# EAGLE board bb8 (EAGLE 6.4)
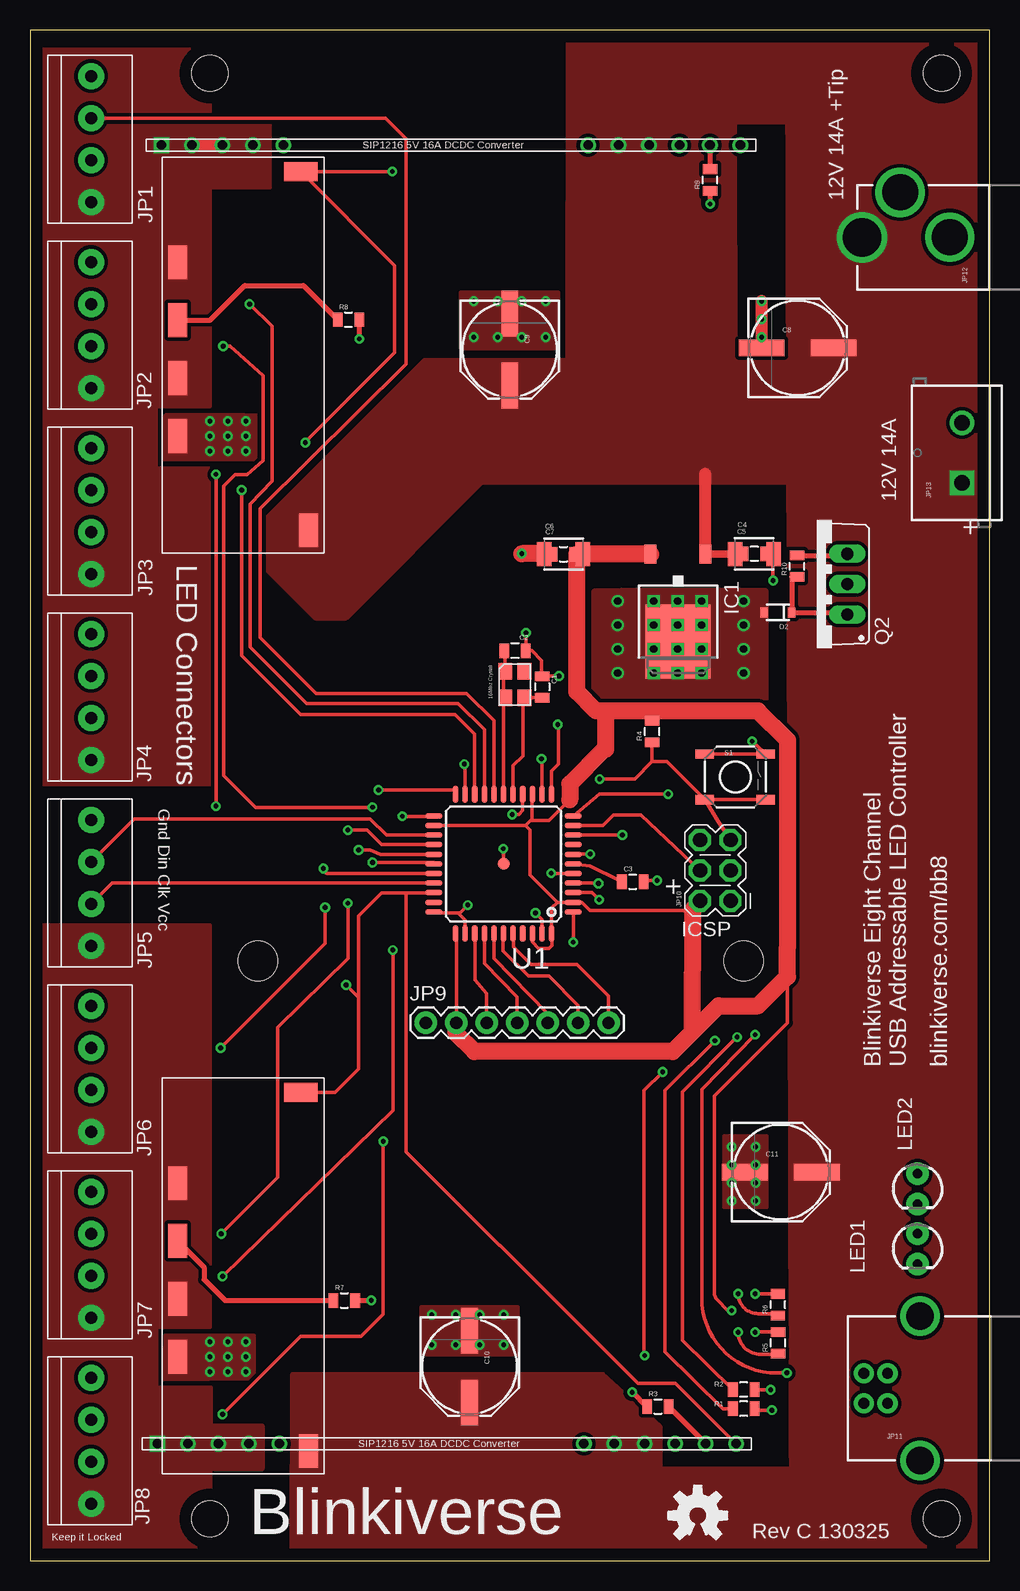
[diagram p0: board, top side]
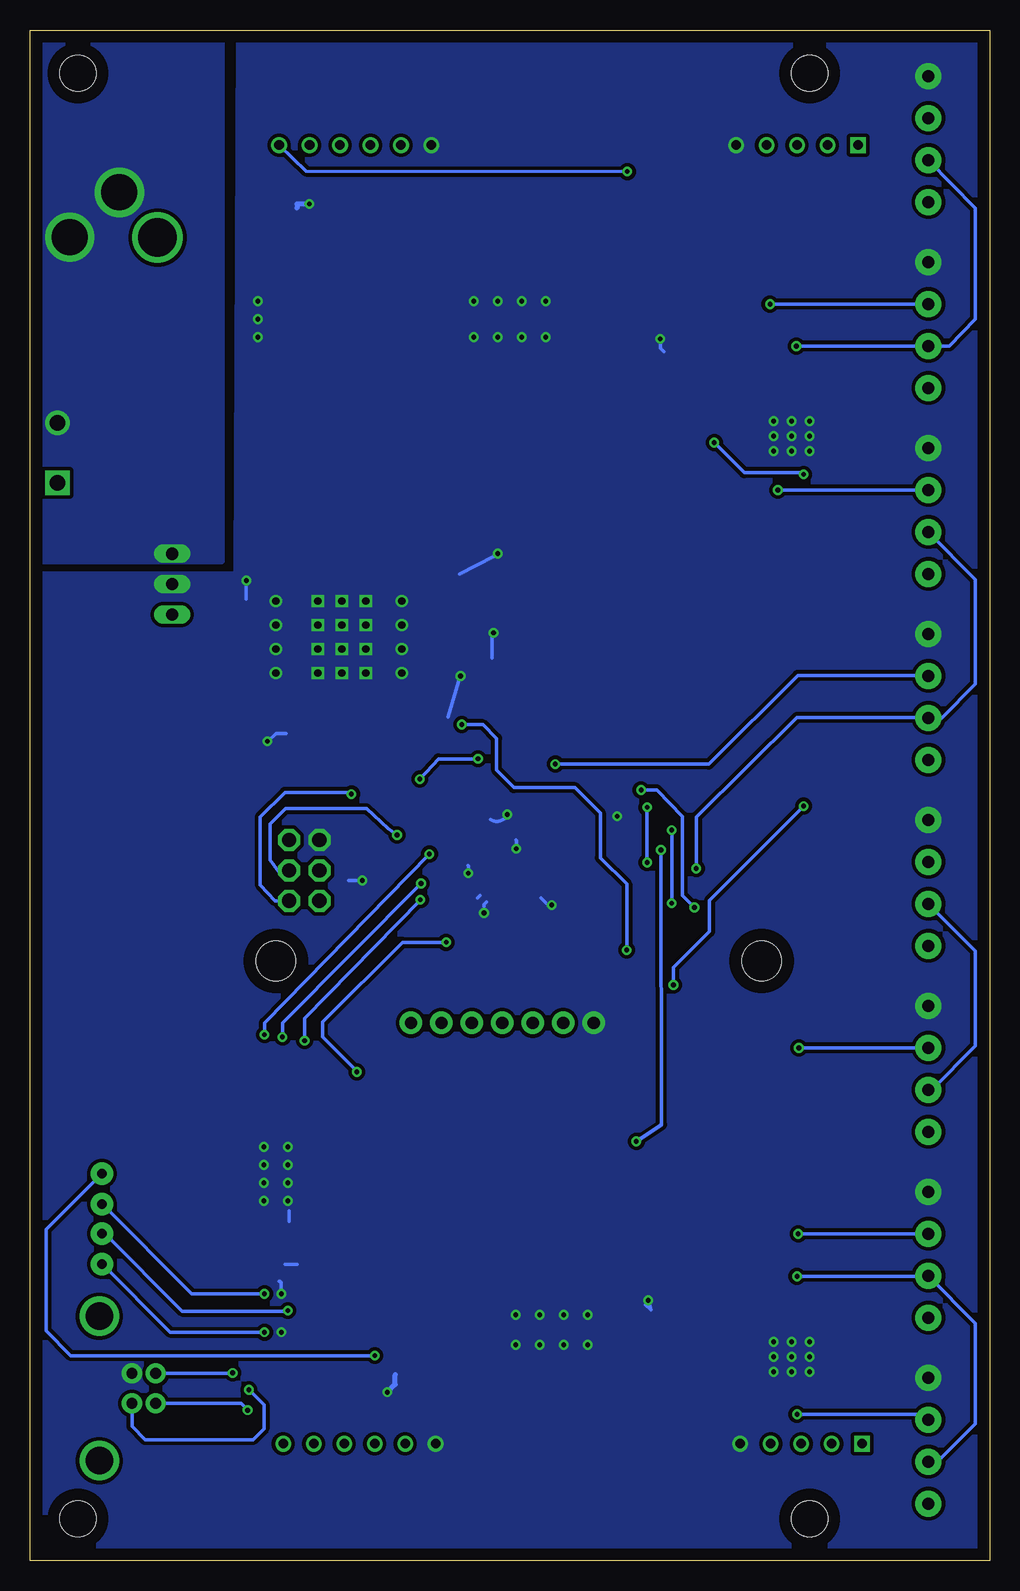
[diagram p1: board, bottom side, seen from below]

Size 80 x 127.6 mm. Coordinates in mm from the lower left corner, seen from the top.
Outline: 0,0 80,0 80,127.6 0,127.6 0,0
Copper layers (1*16): Top 0.035mm / dielectric 1.5mm / Bottom 0.035mm
Design rules "default *": minimum track width 8mil, minimum drill 15mil, track to track 8mil, track to pad 8mil, pad to pad 8mil, via to via 8mil, smd to smd 8mil, copper to edge 40mil, drill to drill 10mil, minimum pad ring 10mil, minimum via ring 8mil, stop-mask expansion 4mil, vias tented up to drill 0mil, thermal gap 10mil
Net classes: 0 default: width 0.305 mm, clearance 0.305 mm; 1 power: width 3.124 mm, clearance 0.635 mm
Holes 3 mm at 15,3.5 76,3.5 15,124 76,124

## Footprints (pad centres in the part's own frame; a part is rotated, then mirrored left to right if it is on the bottom)
0805 = smd 0.8 x 1.2: 1 -0.9,0; 2 0.9,0
1210 = smd 1.2 x 2: 1 -1.6,0; 2 1.6,0
PANASONIC_E = smd 3.8 x 1.4: + 3,0; - -3,0
SOD-323 = smd 0.63 x 0.83: 1 -1.15,0; 2 1.15,0
TO252 = smd 1 x 1.6: 1 -2.28,-4.8; 2 2.28,-4.8 | smd 5.4 x 6.2: 3 0,2.5
1X04-3.5MM = drill 1 pad 2.184: 1 -5.25,0; 2 -1.75,0; 3 1.75,0; 4 5.25,0
1X07 = drill 1.016 pad 1.88: 1 0,0; 2 2.54,0; 3 5.08,0; 4 7.62,0; 5 10.16,0; 6 12.7,0; 7 15.24,0
2X3_POGO = drill 1.2 pad 1.829 octagon: P$1 0,0; P$2 0,2.54; P$3 2.54,0; P$4 2.54,2.54; P$5 5.08,0; P$6 5.08,2.54
USB-B-PTH = drill 0.914 pad 1.676: D+ 0,1.25; D- 1.981,1.25; GND 0,-1.25; VBUS 1.981,-1.25 | drill 2.286: S1 -2.718,-6.02; S2 -2.718,6.02
POWER_JACK_PTH_LOCK = drill 2.997 pad 4.115: GND 0.025,6.557; GNDBREAK 3.762,10.7 | drill 3.2 pad 4.115: PWR 0,13.878
SCREWTERMINAL-5MM-2 = drill 1.3 pad 2.032 square: 1 0,0 | drill 1.3 pad 2.032: 2 5,0
LED3MM = drill 0.813 pad 1.88: A -1.27,0; K 1.27,0
XS3225 = smd 1.4 x 1.15: P$1 -1.1,-0.8; P$2 1.1,-0.8; P$3 1.1,0.8; P$4 -1.1,0.8
TO220BV = drill 1.016 long: D 0,-2.54; G -2.54,-2.54; S 2.54,-2.54
TACTILE_SWITCH_SMD = smd 1.524 x 0.762: 1 -2.54,1.905; 2 2.54,1.905; 3 -2.54,-1.905; 4 2.54,-1.905
ARDUINO_LEONARDO-REV3B_SMARTPRJ_TQFP44-PAD = smd 1.4 x 0.45: 1 -5.8,4; 2 -5.8,3.2; 3 -5.8,2.4; 4 -5.8,1.6; 5 -5.8,0.8; 6 -5.8,0; 7 -5.8,-0.8; 8 -5.8,-1.6; 9 -5.8,-2.4; 10 -5.8,-3.2; 11 -5.8,-4; 23 5.8,-4; 24 5.8,-3.2; 25 5.8,-2.4; 26 5.8,-1.6; 27 5.8,-0.8; 28 5.8,0; 29 5.8,0.8; 30 5.8,1.6; 31 5.8,2.4; 32 5.8,3.2; 33 5.8,4 | smd 0.45 x 1.4: 12 -4,-5.8; 13 -3.2,-5.8; 14 -2.4,-5.8; 15 -1.6,-5.8; 16 -0.8,-5.8; 17 0,-5.8; 18 0.8,-5.8; 19 1.6,-5.8; 20 2.4,-5.8; 21 3.2,-5.8; 22 4,-5.8; 34 4,5.8; 35 3.2,5.8; 36 2.4,5.8; 37 1.6,5.8; 38 0.8,5.8; 39 0,5.8; 40 -0.8,5.8; 41 -1.6,5.8; 42 -2.4,5.8; 43 -3.2,5.8; 44 -4,5.8 | smd 1 x 1: P$1 0,0
SMT1216_DCDC = smd 2.8 x 1.6: 1 1.88,1.28; 3 24.24,12.2; 4 19.41,12.2; 5 14.58,12.2; 6 9.75,12.2 | smd 1.6 x 2.8: 2 31.78,1.91
SIP1216_DCDC = drill 0.8 square: 1 1.27,0.5 | drill 0.8: 2 3.81,0.5; 3 6.35,0.5; 4 8.89,0.5; 5 11.43,0.5; 6 36.83,0.5; 7 39.37,0.5; 8 41.91,0.5; 9 44.45,0.5; 10 46.99,0.5; 11 49.53,0.5
STAND-OFF = hole 3.302: 0,0

## Placement (x,y rotation side)
C1  16pF  [0805]  42.7,72.84 270 top
C2  16pF  [0805]  40.44,75.86 180 top
C3  1uF  [0805]  50.26,56.6 0 top
C4  .3uF  [1210]  60.39,83.93 0 top
C5  .3uF  [0805]  60.39,83.93 180 top
C6  .1uF  [1210]  44.48,83.9 180 top
C7  .1uF  [0805]  44.48,83.91 0 top
C8  [PANASONIC_E]  64,101.1 0 top
C9  [PANASONIC_E]  40,100.95 270 top
C10  [PANASONIC_E]  36.65,16.2 270 top
C11  [PANASONIC_E]  62.6,32.4 0 top
D2  ZENER  [SOD-323]  62.35,79.05 180 top
IC1  7805  [TO252]  54.03,79.12 180 top
JP1  1X4-3.5MM  [1X04-3.5MM]  5.1,118.5 270 top
JP2  1X4-3.5MM  [1X04-3.5MM]  5.1,103 270 top
JP3  1X4-3.5MM  [1X04-3.5MM]  5.1,87.5 270 top
JP4  1X4-3.5MM  [1X04-3.5MM]  5.1,72 270 top
JP5  1X4-3.5MM  [1X04-3.5MM]  5.1,56.5 270 top
JP6  1X4-3.5MM  [1X04-3.5MM]  5.1,41 270 top
JP7  1X4-3.5MM  [1X04-3.5MM]  5.1,25.5 270 top
JP8  1X4-3.5MM  [1X04-3.5MM]  5.1,10 270 top
JP9  [1X07]  33,44.84 0 top
JP10  [2X3_POGO]  58.4,55 90 top
JP11  USB-B  [USB-B-PTH]  71.5,14.36 180 top
JP12  VIN  [POWER_JACK_PTH_LOCK]  83.24,110.3 90 top
JP13  [SCREWTERMINAL-5MM-2]  77.7,89.85 90 top
LED1  PWR  [LED3MM]  74,26 270 top
LED2  DATA  [LED3MM]  74,31 270 top
Q1  16Mhz Crystal  [XS3225]  40.42,73.03 270 top
Q2  [TO220BV]  65.6,81.4 90 top
R1  22  [0805]  59.5,12.67 180 top
R2  22  [0805]  59.5,14.26 180 top
R3  1.47k 1%  [0805]  52.35,12.85 0 top
R4  10k  [0805]  51.86,69.12 90 top
R5  10k  [0805]  62.36,18.17 90 top
R6  10k  [0805]  62.35,21.35 90 top
R7  1.47k 1%  [0805]  26.2,21.7 0 top
R8  1.47k 1%  [0805]  26.55,103.45 0 top
R9  1.47k 1%  [0805]  56.7,115.1 90 top
R10  15k  [0805]  63.95,82.9 90 top
S1  RESET  [TACTILE_SWITCH_SMD]  58.8,65.34 0 top
U1  Atmega32U4  [ARDUINO_LEONARDO-REV3B_SMARTPRJ_TQFP44-PAD]  39.48,58.09 180 top
U$1  SMT1216-SIP1216_DCDCSMT  [SMT1216_DCDC]  24.5,84 90 top
U$2  SMT1216-SIP1216_DCDCSMT  [SMT1216_DCDC]  24.5,7.25 90 top
U$3  SMT1216-SIP1216_DCDCSIP  [SIP1216_DCDC]  9.35,9.25 0 top
U$4  SMT1216-SIP1216_DCDCSIP  [SIP1216_DCDC]  9.7,117.5 0 top
U$12  [OSHW-LOGO-M]  55.68,3.77 0 top
U$13  [STAND-OFF]  19,50 0 top
U$14  [STAND-OFF]  59.5,50 0 top

## Library data of the parts
C1 C2 R1-R10 = SparkFun-Passives
C3 = SparkFun-Capacitors; PROD_ID: CAP-08064
C4-C7 U$13 U$14 = SparkFun
C8-C11 = SparkFun-Capacitors
D2 = SparkFun-DiscreteSemi
IC1 JP1-JP8 = adafruit
JP9 JP12 JP13 = SparkFun-Connectors
JP10 = SparkFun-Connectors; PROD_ID: HW-11044
JP11 = SparkFun-Connectors; PROD_ID: CONN-08278
LED1 LED2 = SparkFun-LED
Q1 U1 U$1-U$4 U$12 = blinkiverse
Q2 = transistor-power
S1 = SparkFun-Electromechanical; PROD_ID: SWCH-08247

## Nets
CLK0-1: JP1.3 JP2.3 U1.28
CLK2-3: JP3.3 JP4.3 U1.29
CLK4-5: JP5.3 JP6.3 U1.30
CLK6-7: JP7.3 JP8.3 U1.12
CNT: U1.31 U$1.2 U$2.2 U$3.11 U$4.11
D2: LED1.K R5.2
GND: C1.1 C2.1 C3.2 C4.2 C5.1 C6.2 C7.1 C8.- C9.- C10.- C11.- D2.2 IC1.3 JP1.1 JP2.1 JP3.1 JP4.1 JP5.1 JP6.1 JP7.1 JP8.1 JP9.1 JP10.P$6 JP11.GND Q2.D R3.1 R5.1 R6.1 R7.2 R8.2 R9.1 S1.1 S1.2 U1.5 U1.15 U1.23 U1.33 U1.35 U1.43 U1.P$1 U$1.6 U$2.6 U$3.5 U$3.6 U$4.5 U$4.6
LED0: JP1.2 U1.18
LED1: JP2.2 U1.19
LED2: JP3.2 U1.20
LED3: JP4.2 U1.21
LED4: JP5.2 U1.25
LED5: JP6.2 U1.22
LED6: JP7.2 U1.26
LED7: JP8.2 U1.27
LED-DATA: LED2.A U1.1
MISO: JP10.P$1 U1.11
MOSI: JP10.P$4 U1.10
N$1: C1.2 Q1.P$3 U1.16
N$2: C2.2 Q1.P$1 U1.17
N$3: R2.2 U1.4
N$4: JP11.D+ R2.1
N$5: R1.2 U1.3
N$6: JP11.D- R1.1
N$7: C3.1 U1.6
N$9: LED2.K R6.2
N$11: JP9.3 U1.36
N$12: JP9.4 U1.37
N$13: JP9.5 U1.38
N$14: JP9.6 U1.39
N$15: JP9.7 U1.40
N$16: D2.1 Q2.G R10.1
N$17: R9.2 U$4.10
N$18: R7.1 U$2.4
N$19: R3.2 U$3.10
N$20: R8.1 U$1.4
PSGND: JP12.GND JP12.GNDBREAK JP13.2 Q2.S R10.2
RST: JP10.P$5 R4.1 S1.3 S1.4 U1.13
SCLK: JP10.P$3 U1.9
SS: U1.8
VCC: C6.1 C7.2 IC1.2 JP9.2 JP10.P$2 LED1.A R4.2 U1.2 U1.14 U1.24 U1.34 U1.42 U1.44
VIN: C4.1 C5.2 C8.+ C9.+ C10.+ C11.+ IC1.1 JP12.PWR JP13.1 U$1.1 U$2.1 U$3.7 U$3.8 U$4.7 U$4.8
VOUT: JP1.4 JP2.4 JP3.4 JP4.4 U$1.3 U$1.5 U$4.1 U$4.2 U$4.3 U$4.4
VOUT2: JP5.4 JP6.4 JP7.4 JP8.4 U$2.3 U$2.5 U$3.1 U$3.2 U$3.3 U$3.4
VUSB: JP11.VBUS U1.7

## Tracks (layer width: path | path; a pad name or v marks a point on that pad's centre or on a via)
CLK0-1  (via drill 0.4)
  Top 0.305: v28.55,62.8 18.8,62.8 16.15,65.45 16.15,89.6 17.1,90.55 18.1,90.55 19.45,91.7 19.45,98.8 16.7,101.25 v16.1,101.25 | v28.55,58.2 33.68,58.2 U1.28
  Bottom 0.305: JP1.3 1.2,112.75 1.2,103.5 3.35,101.25 JP2.3 v16.1,101.25 | v28.55,62.8 v28.55,58.2
CLK2-3  (via drill 0.4)
  Top 0.305: U1.29 24.85,57.3 arc-90 v24.45,57.7
  Bottom 0.305: JP3.3 1.2,81.8 1.2,73.1 4,70.25 JP4.3 5.15,70.3 16.05,70.3 24.45,62 v24.45,57.7
CLK4-5
  Top 0.305: JP5.3 6.84,56.49 U1.30
  Bottom 0.305: JP5.3 1.2,50.85 1.2,42.9 4.8,39.25 JP6.3
CLK6-7  (via drill 0.4)
  Top 0.305: v16.05,23.7 30.25,37.55 30.25,50.1 30.25,50.25 v30.25,50.9 | U1.12 43.48,65.83 44.05,66.4 44.05,69.65 v44,69.7
  Bottom 0.305: JP8.3 4.35,8.25 1.2,11.4 1.2,19.8 JP7.3 5.15,23.7 v16.05,23.7 | v44,69.7 42.25,69.7 41.1,68.55 41.1,65.9 39.65,64.45 34.55,64.45 32.45,62.35 32.45,58.6 30.25,56.4 v30.25,50.9
CNT  (via drill 0.4)
  Top 0.305: 27.4,46.95 27.4,53.75 29.3,55.65 31.35,55.65 | 27.4,46.95 27.4,41 25.43,39.03 U$2.2 | v26.35,48 27.4,46.95 | v30.2,115.8 26.82,115.78 U$1.2 30.4,107.97 30.4,100.7 22.95,93.25 v22.95,93.2 | v15.5,90.55 v15.5,62.9 | U$3.11 58.85,9.75 53.8,14.8 50.7,14.8 39.2,26.3 39.15,26.3 31.35,34.1 31.35,55.65 | U1.31 33.65,55.65 31.35,55.65
  Bottom 0.305: v15.5,62.9 23.35,55.05 23.35,52.45 26.35,49.45 v26.35,48 | U$4.11 56.98,115.85 v30.2,115.8 | v15.5,90.55 15.65,90.7 20.45,90.7 v22.95,93.2
D2  (via drill 0.4)
  Top 0.305: v60.45,19.05 60.47,19.07 R5.2
  Bottom 0.305: LED1.K 68.32,19.05 v60.45,19.05
GND  (via drill 0.4, 0.6)
  Top 0.305: U1.33 33.77,54 35.7,54 | 35.7,54 36.28,53.42 U1.35 | U1.23 33.72,62.05 v31.05,62.05 | 39.41,58.09 U1.P$1 39.48,59.32 v39.45,59.35 | U1.15 41.08,62.53 40.75,62.2 v40.2,62.2 | U1.5 43.46,57.29 v43.45,57.3 | 35.7,54 35.85,54 v36.5,54.65 | v41.35,77.35 41.35,75.87 C2.1 41.84,75.86 42.65,75.05 42.65,73.8 C1.1 42.71,73.75 v44.1,73.75 | C7.1 C6.2 42.84,83.95 | C4.2 C5.1 61.95,83.27 v61.95,81.7 | S1.1 S1.2 60.53,68.05 v60.2,68.3 | C3.2 51.25,56.7 v52.3,56.7 | R6.1 62.2,20.6 60.7,20.6 arc-90 v59.05,22.25 | R5.1 62.3,17.2 60.9,17.2 arc-90 v59.05,19.05 | 28.1,21.7 v28.45,21.7 | U1.43 42.68,53.47 v42.15,54
  Top 0.406: R8.2 v27.45,101.85 | R3.1 50.25,14.05 v50.2,14.05 | R7.2 28.1,21.7 | R9.1 v56.7,113.1
  Top 1.016: C8.- v61,105
  Top 1.422: 42.84,83.95 v41,83.95
  Bottom 0.305: v40.2,62.2 arc102 41.6,61.8 | v43.45,57.3 43.45,57.9 43.5,57.95 | v39.45,59.35 39.45,60.05 39.5,60.1 | v36.5,54.65 36.8,54.65 37.4,55.25 | 42.7,55.25 42.5,55.45 | v41.35,77.35 41.5,77.5 41.5,75.25 | v44.1,73.75 44.15,73.7 45.15,70.35 | v41,83.95 41.35,83.7 44.2,82.25 | v61.95,81.7 62,81.65 62,80.15 | v60.2,68.3 59.5,68.95 58.65,68.95 | v52.3,56.7 53.45,56.7 | 58.75,24.7 57.75,24.7 | 58.4,29.15 58.4,28.3 | v27.45,101.85 27.45,101.1 27.15,100.8 | v28.45,21.7 28.25,20.9 28.7,21.35 | v59.05,22.25 59.05,23.1 arc-90 59.25,23.3 | v42.15,54 42.15,54.7 41.95,54.9
  Bottom 0.406: v50.2,14.05 49.55,14.7 49.55,15.5 | v56.7,113.1 57.75,113.1 57.75,112.75
  other vias: 49,80 49,78 49,76 49,74 59.5,80 59.5,78 59.5,76 59.5,74 15,95 16.5,95 18,95 15,93.75 16.5,93.75 18,93.75 18,92.5 16.5,92.5 15,92.5 15,18.25 16.5,18.25 18,18.25 18,17 16.5,17 15,17 15,15.75 16.5,15.75 18,15.75 52,80 54,80 56,80 52,78 54,78 56,78 56,76 54,76 52,76 52,74 54,74 56,74 61,103.5 61,102 58.5,34.5 60.5,34.5 58.5,33 60.5,33 58.5,31.5 60.5,31.5 60.5,30 58.5,30 33.5,20.5 35.5,20.5 37.5,20.5 39.5,20.5 39.5,18 37.5,18 35.5,18 33.5,18 37,105 39,105 41,105 43,105 43,102 41,102 39,102 37,102
  pour Bottom (no thermals): 79.31,0.47 0.43,0.52 0.26,127.08 62.52,127.29 62.75,82.2 79.4,82.15
  pour Top (no thermals): 49.3,80.8 61.25,80.8 61.25,71.85 47.1,71.85 47.1,80.75
  pour Top (no thermals): 11.35,95.55 17.85,95.55 19,95.5 19,91.8 11.2,91.8 11.15,91.75 11.15,95.35
  pour Top (no thermals): 18.7,18.8 18.7,15.15 11.2,15.1 11.25,18.8
  pour Top (no thermals): 57.85,34.35 57.85,29.45 61.45,29.45 61.45,35.4 57.85,35.4 57.85,34.45
  pour Top (no thermals): 32.6,21.15 40.7,21.15 40.7,17.15 32.6,17.15
  pour Top (no thermals): 35.9,105.05 35.9,105.75 44.05,105.75 44.05,101.05 35.9,101.05 35.9,105
LED0
  Top 0.305: JP1.2 29.65,120.25 31.35,118.55 31.35,99.75 19.2,87.7 19.2,76.95 23.85,72.3 36.4,72.3 38.68,70.02 U1.18
LED1  (via drill 0.4)
  Top 0.305: v18.3,104.75 20.2,102.9 20.2,90 18.35,88.1 18.35,76.15 23.05,71.45 35.7,71.45 37.88,69.27 U1.19
  Bottom 0.305: JP2.2 v18.3,104.75
LED2  (via drill 0.4)
  Top 0.305: v17.65,89.25 17.65,75.45 22.55,70.55 35.45,70.55 37.08,68.92 U1.20
  Bottom 0.305: JP3.2 v17.65,89.25
LED3  (via drill 0.4)
  Top 0.305: v36.2,66.4 36.28,66.32 U1.21
  Bottom 0.305: JP4.2 5.15,73.8 16,73.8 23.4,66.4 v36.2,66.4
LED4
  Top 0.305: JP5.2 8.7,61.85 28.35,61.85 29.71,60.49 U1.25
LED5  (via drill 0.4)
  Top 0.305: v15.9,42.75 24.6,51.45 v24.6,54.45 | v29.05,64.25 35.48,64.25 U1.22
  Bottom 0.305: JP6.2 v15.9,42.75 | v24.6,54.45 25.6,55.45 25.6,62.05 27.75,64.25 v29.05,64.25
LED6  (via drill 0.4)
  Top 0.305: v15.95,27.25 20.65,31.95 20.65,44.45 26.5,50.2 v26.5,54.8 | U1.26 29.31,59.69 28.1,60.9 v26.5,60.9
  Bottom 0.305: JP7.2 v15.95,27.25 | v26.5,60.9 v26.5,54.8
LED7  (via drill 0.4)
  Top 0.305: v16.05,12.2 22.55,18.7 27.6,18.7 29.45,20.55 v29.45,34.95 | U1.27 29.21,58.89 28.35,59.25 v27.4,59.25
  Bottom 0.305: JP8.2 5.55,12.2 v16.05,12.2 | v29.45,34.95 27.35,36.35 v27.4,59.25
LED-DATA  (via drill 0.4)
  Top 0.305: v45.3,51.55 45.3,54.07 U1.1 | v51.25,17.1 51.25,17.15 51.2,17.2 51.2,39.2 v52.75,40.75
  Bottom 0.305: v52.75,40.75 52.75,40.8 55.6,43.65 55.6,44.9 48.95,51.55 v45.3,51.55 | v51.25,17.1 76.6,17.1 78.65,19.15 78.65,27.62 LED2.A
MISO  (via drill 0.4)
  Top 0.305: U1.11 arc-90 45.3,62.1 47.49,63.9 v53.2,63.9
  Bottom 0.305: v53.2,63.9 53.35,64.05 58.75,64.05 60.8,62 60.8,56.35 59.55,55 JP10.P$1
MOSI
  Top 0.305: U1.10 47.79,61.29 48.65,62.15 50.95,62.15 JP10.P$4
N$1
  Top 0.305: C1.2 41.22,71.94 Q1.P$3 41.1,71.82 41.1,67.1 40.28,66.28 U1.16
N$2
  Top 0.305: U1.17 39.48,74 Q1.P$1 39.62,75.78 C2.2
N$3  (via drill 0.4)
  Top 0.305: R2.2 54.4,18.37 54.4,39.1 v58.95,43.65 | v47.4,56.45 47.31,56.49 U1.4
  Bottom 0.305: v58.95,43.65 58.95,44.85 v47.4,56.45
N$4  (via drill 0.4)
  Top 0.305: R2.1 60.42,14.25 v61.75,14.25
  Bottom 0.305: v61.75,14.25 60.5,13 60.5,11 61.4,10.1 70.4,10.1 71.5,11.2 JP11.D+
N$5  (via drill 0.4)
  Top 0.305: R1.2 57.78,12.67 52.95,17.4 52.95,39.2 v57.1,43.35 | U1.3 45.3,55.7 46.85,55.7 v47.45,55.1
  Bottom 0.305: v57.1,43.35 57.1,45.2 v47.45,55.1
N$6  (via drill 0.4)
  Top 0.305: R1.1 60.52,12.55 v61.85,12.55
  Bottom 0.305: v61.85,12.55 62.41,13.11 JP11.D-
N$7
  Top 0.305: U1.6 45.3,58.1 46.7,57.9 49.15,56.7 C3.1
N$9  (via drill 0.4)
  Top 0.305: v60.45,22.25 R6.2
  Bottom 0.305: LED2.K 66.52,22.25 v60.45,22.25
N$11
  Top 0.305: 37.15,52.22 U1.36 37.1,52.27 37.1,48.4 38.08,47.27 JP9.3
N$12
  Top 0.305: JP9.4 40.62,46.98 37.9,49.8 37.9,52.27 U1.37
N$13
  Top 0.305: JP9.5 43.16,45.64 38.7,50.2 38.7,52.27 U1.38
N$14
  Top 0.305: JP9.6 45.7,46.3 43.25,48.75 41.55,48.75 39.45,50.85 39.45,52.26 U1.39
N$15
  Top 0.305: JP9.7 48.24,47.06 45.6,49.7 41.75,49.7 40.3,51.15 40.3,52.27 U1.40
N$16
  Top 0.406: Q2.G 68.14,79.05 D2.1 63.5,82 R10.1
N$17
  Top 0.406: U$4.10 R9.2
  Top 1.016: U$4.10
N$18
  Top 0.406: U$2.4 14.5,24.46 14.5,23.45 16.25,21.7 R7.1
N$19
  Top 0.406: U$3.10 R3.2
N$20
  Top 0.406: U$1.4 15.01,103.41 17.9,106.3 22.8,106.3 R8.1
PSGND
  Top 0.406: R10.2 68.14,83.8 Q2.S
  pour Bottom (no thermals): 63.9,126.55 79.4,126.55 79.4,83.3 63.95,83.3 63.95,126.15 63.95,126.2
RST  (via drill 0.4)
  Top 0.305: v47.5,65.15 50.43,65.15 51.86,66.63 | v42.65,66.85 42.68,66.82 U1.13 | S1.3 S1.4 | S1.3 57.36,61.67 JP10.P$5 | 51.86,66.63 R4.1 | S1.3 53.11,66.63 51.86,66.63
  Bottom 0.305: v47.5,65.15 45.95,66.85 v42.65,66.85
SCLK  (via drill 0.4)
  Top 0.305: v49.4,60.5 48.56,60.49 U1.9
  Bottom 0.305: JP10.P$3 58.46,57.5 59.3,57.5 60,58.4 60,61.4 58.7,62.7 51.95,62.7 50.15,61.05 v49.4,60.5
VCC  (via drill 0.4)
  Top 0.305: U1.34 35.55,52.22 JP9.2 35.79,44.6 | U1.24 39,61.3 41.3,61.3 | 41.3,61.3 41.73,61.73 | 41.73,61.73 41.85,61.85 41.85,63.85 U1.14 | 43.96,54.89 U1.2 46.01,54.89 46.7,54.2 55.23,54.2 55.35,54.2 55.35,54.15 | 43.96,54.89 41.7,57.15 41.7,60.9 41.3,61.3 | U1.42 41.88,51.57 42.4,51.05 43.25,51.05 43.5,51.3 43.5,52.27 U1.44 43.48,54.41 43.96,54.89 | 45,63.45 43.27,61.73 41.73,61.73 | IC1.2 51.73,83.9 | C6.1 C7.2 | 63.15,51.2 63.15,44.85 57.05,38.75 57.05,22.4 arc37 57.25,21.8 58.2,20.85 v58.5,20.85 | R4.2 51.9,70.06 51.9,70.85
  Top 0.61: 35.79,44.6 JP9.2 | 45.6,83.9 C6.1
  Top 1.422: 45,63.45 45,64.75 47.9,67.65 48,67.65 48,70.85 | 51.73,83.9 C6.1 | 48,70.85 51.9,70.85 60.7,70.85 63.15,68.4 63.15,51.2 63.15,48.7 60.7,46.25 57.4,46.25 55.17,44.02 | 48,70.85 47.2,70.85 45.6,72.45 45.6,80.7 45.6,83.9 | 55.17,44.02 53.6,42.45 37.05,42.45 35.54,43.96 JP9.2 | JP10.P$2 55.23,54.2 55.17,44.02
  Bottom 0.305: LED1.A 73.77,27.27 67.3,20.8 58.55,20.8 v58.5,20.85
VIN
  Top 0.61: IC1.1 C4.1 C5.2
  Top 1.016: IC1.1 56.3,90.6
  pour Top (no thermals): 63.2,126.75 79.65,126.75 79.75,0.65 63.5,0.65
  pour Top (no thermals): 44.8,99.35 58.8,99.25 58.75,119.95 65.1,119.9 65.15,127.1 44.85,127.3
  pour Top (no thermals): 47.7,15.6 52.5,11.2 52.5,7.65 64.85,7.65 64.9,0.4 21.85,0.55 21.9,15.55
  pour Top (no thermals): 63.65,100.05 32.9,100.05 17.7,84.85 17.7,84.7 23.8,78.6 26.35,78.6 37.65,89.9 64.45,89.9 64.65,90.1 64.65,99.45 63.95,100.15
VOUT
  Top 1.016: U$4.3 U$4.2
  pour Top (no thermals): 0.35,126 15,126 15,96.2 10.5,96.2 10.5,91.1 14.95,91.1 15,64.7 0.35,64.7
  pour Top (no thermals): 10.75,119.9 20,120.25 20,114.45 10.8,114.45
VOUT2
  pour Top (no thermals): 0.35,53 15,53 15,19.45 10.55,19.45 10.55,14.45 15.1,14.45 15,0.35 0.35,0.35
  pour Top (no thermals): 9.95,11.25 19.35,11.25 19.35,7.65 9.95,7.65 9.95,11.05
VUSB  (via drill 0.4)
  Top 0.305: U1.7 45.3,58.9 v46.7,58.9 | v63.1,15.65 62.25,15.65 arc-90 56,21.9 56,39.3 v60.45,43.85
  Bottom 0.305: v63.1,15.65 63.14,15.61 JP11.VBUS | v60.45,43.85 60.45,44.85 v46.7,58.9

## Text on the board
tPlace: 12V 14A +Tip | 12V 14A | + | LED Connectors | 16Mhz Crystal | Gnd Din Clk Vcc | + | Blinkiverse Eight Channel / USB Addressable LED Controller | blinkiverse.com/bb8 | Keep it Locked | Blinkiverse | Rev C 130325
tNames: ICSP